# Altium PCB PCB1.PcbDoc (part 4 of 6)
Units mil, origin at the board's own origin, x right, y up, seen from the top; angles counter-clockwise.
Board outline 1280 x 1960 mil, 2 copper layers (Top Layer, Bottom Layer); 45 components, 63 nets, 326 pads, 83 vias.
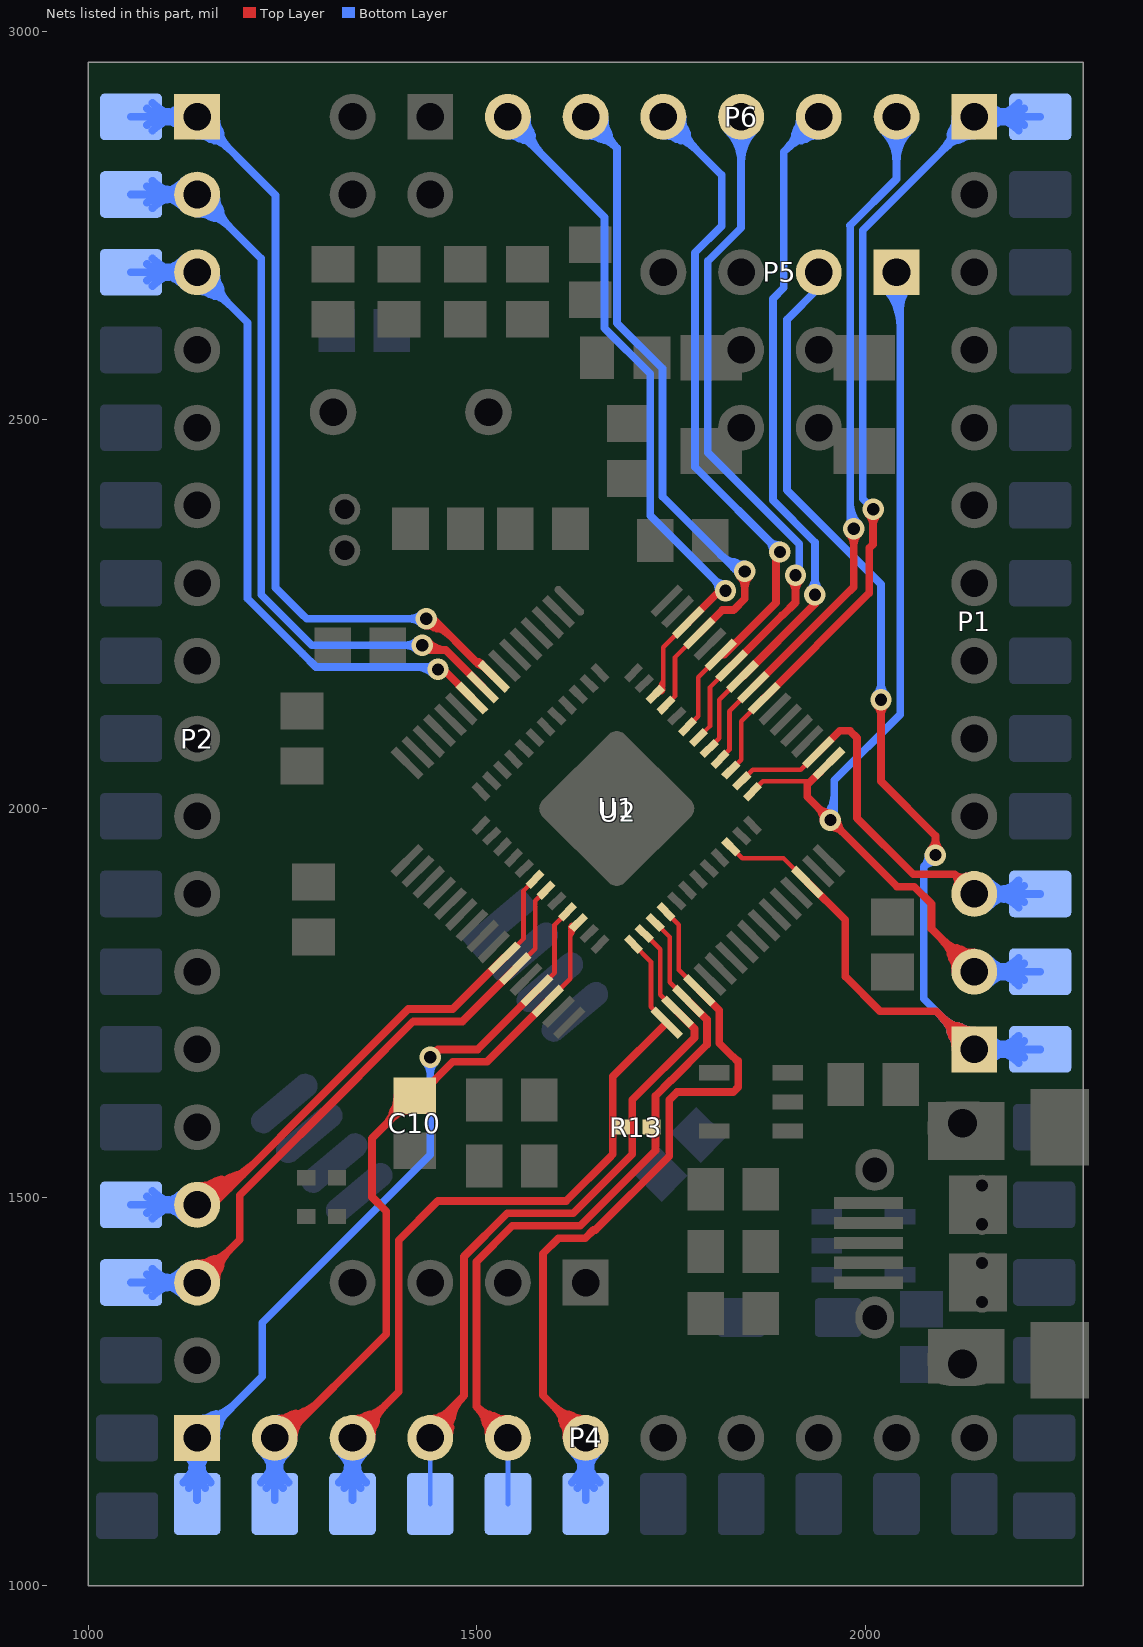
[diagram p4: the nets of this part, all layers, seen from the top]

## Via types
v1: diameter 27.56, hole 15.75, Top Layer to Bottom Layer, tented both sides, 79 vias
v2: diameter 23.62, hole 13.78, Top Layer to Bottom Layer, tented both sides, 3 vias
v3: diameter 23.62, hole 13.78, Top Layer to Bottom Layer, tented top, 1 vias

## Nets (pads, with @x,y where several pads share a name; then routed paths per layer and width w, separated by ;. In a path a pad name is that pad's centre, name@x,y a point inside that pad or via, vN(x,y) a via of type N, cw(c..) or ccw(c..) an arc to the next point about the centre after c; other vN are vias at no path point) (continued)
PA13: P1.1 P5.2 pad.1@2225,1690 U1.34 U2.46 | length 3637.7
  Top Layer w6: U1.34@1826.85,1950.59 1841.44,1936 1894.6,1936 U2.46@1925.26,1905.33
  Top Layer w10: U2.46@1925.26,1905.33 1974,1856.6 1974,1835 1973.91,1834.91 1973.91,1783.91 2018.83,1739 2091,1739 P1.1@2140,1690 ; v1(2020,2140) 2020,2035 2090,1965 v1(2090,1940) ; 2109.48,1712.35 ccw(c2146.61,1722.3) P1.1@2138.9,1684.64 ; 2117.65,1720.52 cw(c2107.7,1683.39) P1.1@2145.36,1691.1 ; 2020,2118.8 cw(c2041.2,2118.8) 2026.21,2133.79 ccw(c2041.2,2118.8) 2020,2118.8 ; 2020,2118.8 ccw(c1998.8,2118.8) 2013.79,2133.79 cw(c1998.8,2118.8) 2020,2118.8 ; 2090,1961.2 cw(c2068.8,1961.2) 2083.79,1946.21 ccw(c2068.8,1961.2) 2090,1961.2 ; 2090,1961.2 ccw(c2111.2,1961.2) 2096.21,1946.21 cw(c2111.2,1961.2) 2090,1961.2 ; 2098.13,1731.87 cw(c2056.26,1690) 2115.47,1690 ccw(c2056.26,1690) 2098.13,1731.87 ; 2098.13,1731.87 ccw(c2140,1773.74) 2140,1714.53 cw(c2140,1773.74) 2098.13,1731.87 ; P1.1@2115.2,1714.8 cw(c2090.4,1690) 2125.47,1690 ccw(c2090.4,1690) P1.1@2115.2,1714.8 ; P1.1@2115.2,1714.8 ccw(c2140,1739.6) 2140,1704.53 cw(c2140,1739.6) P1.1@2115.2,1714.8
  Bottom Layer w10: P5.2@1940,2690 1940,2670 1899,2629 1899,2409.63 2020,2288.63 v1(2020,2140) ; v1(2090,1940) 2075,1925 ; 2109.48,1712.35 ccw(c2146.61,1722.3) P1.1@2138.9,1684.64 ; 2117.65,1720.52 cw(c2107.7,1683.39) P1.1@2145.36,1691.1 ; P1.1@2160.62,1676.72 cw(c2174.28,1667.93) 2178.48,1683.61 cw(c2184.22,1705.04) P1.1@2163.22,1697.9 ; P1.1@2160.62,1703.28 ccw(c2174.28,1712.07) 2178.48,1696.39 ccw(c2184.22,1674.96) P1.1@2163.22,1682.1 ; pad.1@2225,1690 P1.1@2140,1690 2075,1755 2075,1925 ; 2020,2161.2 cw(c1998.8,2161.2) 2013.79,2146.21 ccw(c1998.8,2161.2) 2020,2161.2 ; 2020,2161.2 ccw(c2041.2,2161.2) 2026.21,2146.21 cw(c2041.2,2161.2) 2020,2161.2 ; 2075.01,1925.01 cw(c2090,1910.02) 2090,1931.22 ccw(c2090,1910.02) 2075.01,1925.01 ; 2075.01,1925.01 ccw(c2060.02,1940) 2081.22,1940 cw(c2060.02,1940) 2075.01,1925.01 ; 2098.13,1731.87 cw(c2056.26,1690) 2115.47,1690 ccw(c2056.26,1690) 2098.13,1731.87 ; 2098.13,1731.87 ccw(c2140,1773.74) 2140,1714.53 cw(c2140,1773.74) 2098.13,1731.87 ; P1.1@2115.2,1714.8 cw(c2090.4,1690) 2125.47,1690 ccw(c2090.4,1690) P1.1@2115.2,1714.8 ; P1.1@2115.2,1714.8 ccw(c2140,1739.6) 2140,1704.53 cw(c2140,1739.6) P1.1@2115.2,1714.8 ; P1.1@2154.64,1690 cw(c2154.64,1629.64) 2197.32,1672.32 ccw(c2154.64,1629.64) P1.1@2154.64,1690 ; P1.1@2154.64,1690 ccw(c2154.64,1750.36) 2197.32,1707.68 cw(c2154.64,1750.36) P1.1@2154.64,1690 ; 2175.07,1690 cw(c2175.07,1725.07) 2150.27,1700.27 ccw(c2175.07,1725.07) 2175.07,1690 ; 2175.07,1690 ccw(c2175.07,1654.93) 2150.27,1679.73 cw(c2175.07,1654.93) 2175.07,1690 ; 2176.44,1683.9 cw(c2180.44,1668.97) pad.1@2193.64,1677.01 ; 2176.44,1683.9 ccw(c2170.88,1704.65) pad.1@2191.27,1697.88 ; 2176.44,1683.9 cw(c2180.44,1668.97) pad.1@2193.64,1677.01 ; 2176.44,1683.9 ccw(c2170.88,1704.65) pad.1@2191.27,1697.88 ; 2176.44,1683.9 cw(c2180.44,1668.97) pad.1@2193.64,1677.01 ; 2176.44,1683.9 ccw(c2170.88,1704.65) pad.1@2191.27,1697.88 ; 2176.44,1696.1 cw(c2170.88,1675.35) pad.1@2191.27,1682.12 ; 2176.44,1696.1 ccw(c2180.44,1711.03) pad.1@2193.64,1702.99 ; 2176.44,1696.1 cw(c2170.88,1675.35) pad.1@2191.27,1682.12 ; 2176.44,1696.1 ccw(c2180.44,1711.03) pad.1@2193.64,1702.99 ; 2176.44,1696.1 cw(c2170.88,1675.35) pad.1@2191.27,1682.12 ; 2176.44,1696.1 ccw(c2180.44,1711.03) pad.1@2193.64,1702.99 ; 2178.79,1690 cw(c2178.79,1653.79) 2204.39,1679.39 ccw(c2178.79,1653.79) 2178.79,1690 ; 2178.79,1690 ccw(c2178.79,1726.21) 2204.39,1700.61 cw(c2178.79,1726.21) 2178.79,1690 ; pad.1@2199.21,1690 cw(c2199.21,1749.21) 2157.34,1707.34 ccw(c2199.21,1749.21) pad.1@2199.21,1690 ; pad.1@2199.21,1690 ccw(c2199.21,1630.79) 2157.34,1672.66 cw(c2199.21,1630.79) pad.1@2199.21,1690
PA14: P1.2 P5.1 pad.1@2225,1790 U1.37 U2.49 | length 3187.6
  Top Layer w6: U1.37@1854.69,2021.58 1868.11,2035 1929.66,2035 ; U2.49@1941.38,2046.72 U2.49@1953.1,2058.45
  Top Layer w10: U2.49@1941.38,2046.72 1929.66,2035 1925,2030.34 1925,2015 1965,1975 ; 1943.77,1994.15 ccw(c1957.64,1997.87) v1@1954.76,1983.8 ; 1945.85,1996.23 cw(c1942.13,1982.36) v1@1956.2,1985.24 ; v1@1953.8,1984.76 ccw(c1967.87,1987.64) 1964.15,1973.77 ; v1@1955.24,1986.2 cw(c1952.36,1972.13) 1966.23,1975.85 ; 2109.48,1812.35 ccw(c2146.61,1822.3) P1.2@2138.9,1784.64 ; 2117.65,1820.52 cw(c2107.7,1783.39) P1.2@2145.36,1791.1 ; P1.2@2140,1790 2085,1845 2085,1877.17 2062.95,1899.22 2040.78,1899.22 1965,1975 ; 1940.01,1999.99 cw(c1925.02,1985) 1946.22,1985 ccw(c1925.02,1985) 1940.01,1999.99 ; 1940.01,1999.99 ccw(c1955,2014.98) 1955,1993.78 cw(c1955,2014.98) 1940.01,1999.99 ; v1@1957.81,1976.68 cw(c1960.05,1970.05) 1965,1975 ; v1@1957.81,1976.68 cw(c1960.05,1970.05) 1965,1975 ; v1@1957.81,1976.68 cw(c1960.05,1970.05) 1965,1975 ; v1@1957.81,1976.68 cw(c1960.05,1970.05) 1965,1975 ; v1@1963.32,1982.19 ccw(c1969.95,1979.95) 1965,1975 ; v1@1963.32,1982.19 ccw(c1969.95,1979.95) 1965,1975 ; v1@1963.32,1982.19 ccw(c1969.95,1979.95) 1965,1975 ; v1@1963.32,1982.19 ccw(c1969.95,1979.95) 1965,1975 ; 1969.99,1970.01 cw(c1984.98,1985) 1963.78,1985 ccw(c1984.98,1985) 1969.99,1970.01 ; 1969.99,1970.01 ccw(c1955,1955.02) 1955,1976.22 cw(c1955,1955.02) 1969.99,1970.01 ; 2098.13,1831.87 cw(c2056.26,1790) 2115.47,1790 ccw(c2056.26,1790) 2098.13,1831.87 ; 2098.13,1831.87 ccw(c2140,1873.74) 2140,1814.53 cw(c2140,1873.74) 2098.13,1831.87 ; 2115.2,1814.8 cw(c2090.4,1790) 2125.47,1790 ccw(c2090.4,1790) 2115.2,1814.8 ; 2115.2,1814.8 ccw(c2140,1839.6) 2140,1804.53 cw(c2140,1839.6) 2115.2,1814.8
  Bottom Layer w10: v1@1960,1985 1960,2036.09 2044.78,2120.87 2044.78,2685.22 P5.1@2040,2690 ; P1.2@2140,1790 pad.1@2225,1790 ; P1.2@2160.62,1776.72 cw(c2174.28,1767.93) 2178.48,1783.61 cw(c2184.22,1805.04) P1.2@2163.22,1797.9 ; P1.2@2160.62,1803.28 ccw(c2174.28,1812.07) 2178.48,1796.39 ccw(c2184.22,1774.96) P1.2@2163.22,1782.1 ; P1.2@2154.64,1790 cw(c2154.64,1729.64) 2197.32,1772.32 ccw(c2154.64,1729.64) P1.2@2154.64,1790 ; P1.2@2154.64,1790 ccw(c2154.64,1850.36) 2197.32,1807.68 cw(c2154.64,1850.36) P1.2@2154.64,1790 ; 2175.07,1790 cw(c2175.07,1825.07) 2150.27,1800.27 ccw(c2175.07,1825.07) 2175.07,1790 ; 2175.07,1790 ccw(c2175.07,1754.93) 2150.27,1779.73 cw(c2175.07,1754.93) 2175.07,1790 ; 2176.44,1783.9 cw(c2180.44,1768.97) pad.1@2193.64,1777.01 ; 2176.44,1783.9 ccw(c2170.88,1804.65) pad.1@2191.27,1797.88 ; 2176.44,1783.9 cw(c2180.44,1768.97) pad.1@2193.64,1777.01 ; 2176.44,1783.9 ccw(c2170.88,1804.65) pad.1@2191.27,1797.88 ; 2176.44,1783.9 cw(c2180.44,1768.97) pad.1@2193.64,1777.01 ; 2176.44,1783.9 ccw(c2170.88,1804.65) pad.1@2191.27,1797.88 ; 2176.44,1796.1 cw(c2170.88,1775.35) pad.1@2191.27,1782.12 ; 2176.44,1796.1 ccw(c2180.44,1811.03) pad.1@2193.64,1802.99 ; 2176.44,1796.1 cw(c2170.88,1775.35) pad.1@2191.27,1782.12 ; 2176.44,1796.1 ccw(c2180.44,1811.03) pad.1@2193.64,1802.99 ; 2176.44,1796.1 cw(c2170.88,1775.35) pad.1@2191.27,1782.12 ; 2176.44,1796.1 ccw(c2180.44,1811.03) pad.1@2193.64,1802.99 ; 2178.79,1790 cw(c2178.79,1753.79) 2204.39,1779.39 ccw(c2178.79,1753.79) 2178.79,1790 ; 2178.79,1790 ccw(c2178.79,1826.21) 2204.39,1800.61 cw(c2178.79,1826.21) 2178.79,1790 ; pad.1@2199.21,1790 cw(c2199.21,1849.21) 2157.34,1807.34 ccw(c2199.21,1849.21) pad.1@2199.21,1790 ; pad.1@2199.21,1790 ccw(c2199.21,1730.79) 2157.34,1772.66 cw(c2199.21,1730.79) pad.1@2199.21,1790 ; v1@1948.79,1991.21 ccw(c1921.73,2018.27) 1960,2018.27 cw(c1921.73,2018.27) v1@1948.79,1991.21 ; P5.1@2022.66,2672.66 cw(c1969.25,2619.25) 2044.78,2619.25 ccw(c1969.25,2619.25) P5.1@2022.66,2672.66 ; P5.1@2029.73,2679.73 cw(c1993.39,2643.39) 2044.78,2643.39 ccw(c1993.39,2643.39) P5.1@2029.73,2679.73 ; 2044.78,2642.32 cw(c2087.68,2642.32) 2057.34,2672.66 ccw(c2087.68,2642.32) 2044.78,2642.32
  other v1: 1955,1985
PA15: P1.3 pad.1@2225,1890 U1.38 U2.50 | length 1555
  Top Layer w6: U1.38@1840.77,2035.49 1855,2049.72 1916.54,2049.72 U2.50@1939.18,2072.36
  Top Layer w10: U2.50@1939.18,2072.36 1966.82,2100 1980,2100 1989.22,2090.78 1989.22,1987.55 2061.55,1915.22 2114.78,1915.22 ; P1.3@2140,1890 2114.78,1915.22 ; 2114.78,1915.22 cw(c2105.12,1905.56) 2117.6,1899.99 ccw(c2105.12,1905.56) 2114.78,1915.22 ; 2114.78,1915.22 ccw(c2124.44,1924.88) 2130.01,1912.4 cw(c2124.44,1924.88) 2114.78,1915.22
  Bottom Layer w10: P1.3@2140,1890 pad.1@2225,1890 ; P1.3@2160.62,1876.72 cw(c2174.28,1867.93) 2178.48,1883.61 cw(c2184.22,1905.04) P1.3@2163.22,1897.9 ; P1.3@2160.62,1903.28 ccw(c2174.28,1912.07) 2178.48,1896.39 ccw(c2184.22,1874.96) P1.3@2163.22,1882.1 ; P1.3@2154.64,1890 cw(c2154.64,1829.64) 2197.32,1872.32 ccw(c2154.64,1829.64) P1.3@2154.64,1890 ; P1.3@2154.64,1890 ccw(c2154.64,1950.36) 2197.32,1907.68 cw(c2154.64,1950.36) P1.3@2154.64,1890 ; 2175.07,1890 cw(c2175.07,1925.07) 2150.27,1900.27 ccw(c2175.07,1925.07) 2175.07,1890 ; 2175.07,1890 ccw(c2175.07,1854.93) 2150.27,1879.73 cw(c2175.07,1854.93) 2175.07,1890 ; 2176.44,1883.9 cw(c2180.44,1868.97) pad.1@2193.64,1877.01 ; 2176.44,1883.9 ccw(c2170.88,1904.65) pad.1@2191.27,1897.88 ; 2176.44,1883.9 cw(c2180.44,1868.97) pad.1@2193.64,1877.01 ; 2176.44,1883.9 ccw(c2170.88,1904.65) pad.1@2191.27,1897.88 ; 2176.44,1883.9 cw(c2180.44,1868.97) pad.1@2193.64,1877.01 ; 2176.44,1883.9 ccw(c2170.88,1904.65) pad.1@2191.27,1897.88 ; 2176.44,1896.1 cw(c2170.88,1875.35) pad.1@2191.27,1882.12 ; 2176.44,1896.1 ccw(c2180.44,1911.03) pad.1@2193.64,1902.99 ; 2176.44,1896.1 cw(c2170.88,1875.35) pad.1@2191.27,1882.12 ; 2176.44,1896.1 ccw(c2180.44,1911.03) pad.1@2193.64,1902.99 ; 2176.44,1896.1 cw(c2170.88,1875.35) pad.1@2191.27,1882.12 ; 2176.44,1896.1 ccw(c2180.44,1911.03) pad.1@2193.64,1902.99 ; 2178.79,1890 cw(c2178.79,1853.79) 2204.39,1879.39 ccw(c2178.79,1853.79) 2178.79,1890 ; 2178.79,1890 ccw(c2178.79,1926.21) 2204.39,1900.61 cw(c2178.79,1926.21) 2178.79,1890 ; pad.1@2199.21,1890 cw(c2199.21,1949.21) 2157.34,1907.34 ccw(c2199.21,1949.21) pad.1@2199.21,1890 ; pad.1@2199.21,1890 ccw(c2199.21,1830.79) 2157.34,1872.66 cw(c2199.21,1830.79) pad.1@2199.21,1890
PB0: P2.15 pad.1@1055,1490 U1.18 U2.26 | length 2203.2
  Top Layer w6: U2.26@1535.52,1807.9 1560,1832.38 1560,1893.92 U1.18@1574.91,1908.83
  Top Layer w10: P2.15@1135.03,1492.3 cw(c1186.01,1468.71) 1171.47,1522.96 ; P2.15@1140,1490 1160,1490 1333,1663 1333,1663.25 1411.75,1742 1469.07,1742 1534.97,1807.9 U2.26@1535.52,1807.9 ; P2.15@1144.11,1488.1 cw(c1211.26,1457.02) 1192.11,1528.49 ; P2.15@1144.3,1488.59 cw(c1178.9,1477.26) 1169.48,1512.43 ; P2.15@1140,1494.53 ccw(c1140,1553.74) 1181.87,1511.87 cw(c1140,1553.74) P2.15@1140,1494.53 ; P2.15@1140,1504.53 ccw(c1140,1587.88) 1198.94,1528.94 cw(c1140,1587.88) P2.15@1140,1504.53 ; P2.15@1140,1514.53 ccw(c1140,1622.03) 1216.01,1546.01 cw(c1140,1622.03) P2.15@1140,1514.53
  Bottom Layer w10: pad.1@1055,1490 P2.15@1140,1490 ; P2.15@1116.78,1482.1 ccw(c1095.78,1474.96) 1101.52,1496.39 ccw(c1105.72,1512.07) P2.15@1119.38,1503.28 ; P2.15@1116.78,1497.9 cw(c1095.78,1505.04) 1101.52,1483.61 cw(c1105.72,1467.93) P2.15@1119.38,1476.72 ; pad.1@1080.79,1490 cw(c1080.79,1430.79) 1122.66,1472.66 ccw(c1080.79,1430.79) pad.1@1080.79,1490 ; pad.1@1080.79,1490 ccw(c1080.79,1549.21) 1122.66,1507.34 cw(c1080.79,1549.21) pad.1@1080.79,1490 ; pad.1@1086.36,1477.01 cw(c1099.56,1468.97) 1103.56,1483.9 ; pad.1@1086.36,1477.01 cw(c1099.56,1468.97) 1103.56,1483.9 ; pad.1@1086.36,1477.01 cw(c1099.56,1468.97) 1103.56,1483.9 ; pad.1@1086.36,1502.99 ccw(c1099.56,1511.03) 1103.56,1496.1 ; pad.1@1086.36,1502.99 ccw(c1099.56,1511.03) 1103.56,1496.1 ; pad.1@1086.36,1502.99 ccw(c1099.56,1511.03) 1103.56,1496.1 ; pad.1@1088.73,1482.12 cw(c1109.12,1475.35) 1103.56,1496.1 ; pad.1@1088.73,1482.12 cw(c1109.12,1475.35) 1103.56,1496.1 ; pad.1@1088.73,1482.12 cw(c1109.12,1475.35) 1103.56,1496.1 ; pad.1@1088.73,1497.88 ccw(c1109.12,1504.65) 1103.56,1483.9 ; pad.1@1088.73,1497.88 ccw(c1109.12,1504.65) 1103.56,1483.9 ; pad.1@1088.73,1497.88 ccw(c1109.12,1504.65) 1103.56,1483.9 ; 1101.21,1490 cw(c1101.21,1526.21) 1075.61,1500.61 ccw(c1101.21,1526.21) 1101.21,1490 ; 1101.21,1490 ccw(c1101.21,1453.79) 1075.61,1479.39 cw(c1101.21,1453.79) 1101.21,1490 ; 1104.93,1490 cw(c1104.93,1454.93) 1129.73,1479.73 ccw(c1104.93,1454.93) 1104.93,1490 ; 1104.93,1490 ccw(c1104.93,1525.07) 1129.73,1500.27 cw(c1104.93,1525.07) 1104.93,1490 ; P2.15@1125.36,1490 cw(c1125.36,1550.36) 1082.68,1507.68 ccw(c1125.36,1550.36) P2.15@1125.36,1490 ; P2.15@1125.36,1490 ccw(c1125.36,1429.64) 1082.68,1472.32 cw(c1125.36,1429.64) P2.15@1125.36,1490
PB1: P2.16 pad.1@1055,1390 U1.19 U2.27 | length 2124.8
  Top Layer w6: U2.27@1549.44,1793.98 1575,1819.54 1575,1881.08 U1.19@1588.83,1894.91
  Top Layer w10: P2.16@1134.64,1391.1 cw(c1172.3,1383.39) 1162.35,1420.52 ; P2.16@1140,1390 1195,1445 1195,1502.37 1349,1656.37 1349,1656.63 1418.37,1726 1481.46,1726 U2.27@1549.44,1793.98 ; P2.16@1141.1,1384.64 ccw(c1133.39,1422.3) 1170.52,1412.35 ; 1164.8,1414.8 cw(c1140,1439.6) 1140,1404.53 ccw(c1140,1439.6) 1164.8,1414.8 ; 1164.8,1414.8 ccw(c1189.6,1390) 1154.53,1390 cw(c1189.6,1390) 1164.8,1414.8 ; 1181.87,1431.87 cw(c1140,1473.74) 1140,1414.53 ccw(c1140,1473.74) 1181.87,1431.87 ; 1181.87,1431.87 ccw(c1223.74,1390) 1164.53,1390 cw(c1223.74,1390) 1181.87,1431.87
  Bottom Layer w10: pad.1@1055,1390 P2.16@1140,1390 ; P2.16@1116.78,1382.1 ccw(c1095.78,1374.96) 1101.52,1396.39 ccw(c1105.72,1412.07) P2.16@1119.38,1403.28 ; P2.16@1116.78,1397.9 cw(c1095.78,1405.04) 1101.52,1383.61 cw(c1105.72,1367.93) P2.16@1119.38,1376.72 ; pad.1@1080.79,1390 cw(c1080.79,1330.79) 1122.66,1372.66 ccw(c1080.79,1330.79) pad.1@1080.79,1390 ; pad.1@1080.79,1390 ccw(c1080.79,1449.21) 1122.66,1407.34 cw(c1080.79,1449.21) pad.1@1080.79,1390 ; pad.1@1086.36,1377.01 cw(c1099.56,1368.97) 1103.56,1383.9 ; pad.1@1086.36,1377.01 cw(c1099.56,1368.97) 1103.56,1383.9 ; pad.1@1086.36,1377.01 cw(c1099.56,1368.97) 1103.56,1383.9 ; pad.1@1086.36,1402.99 ccw(c1099.56,1411.03) 1103.56,1396.1 ; pad.1@1086.36,1402.99 ccw(c1099.56,1411.03) 1103.56,1396.1 ; pad.1@1086.36,1402.99 ccw(c1099.56,1411.03) 1103.56,1396.1 ; pad.1@1088.73,1382.12 cw(c1109.12,1375.35) 1103.56,1396.1 ; pad.1@1088.73,1382.12 cw(c1109.12,1375.35) 1103.56,1396.1 ; pad.1@1088.73,1382.12 cw(c1109.12,1375.35) 1103.56,1396.1 ; pad.1@1088.73,1397.88 ccw(c1109.12,1404.65) 1103.56,1383.9 ; pad.1@1088.73,1397.88 ccw(c1109.12,1404.65) 1103.56,1383.9 ; pad.1@1088.73,1397.88 ccw(c1109.12,1404.65) 1103.56,1383.9 ; 1101.21,1390 cw(c1101.21,1426.21) 1075.61,1400.61 ccw(c1101.21,1426.21) 1101.21,1390 ; 1101.21,1390 ccw(c1101.21,1353.79) 1075.61,1379.39 cw(c1101.21,1353.79) 1101.21,1390 ; 1104.93,1390 cw(c1104.93,1354.93) 1129.73,1379.73 ccw(c1104.93,1354.93) 1104.93,1390 ; 1104.93,1390 ccw(c1104.93,1425.07) 1129.73,1400.27 cw(c1104.93,1425.07) 1104.93,1390 ; P2.16@1125.36,1390 cw(c1125.36,1450.36) 1082.68,1407.68 ccw(c1125.36,1450.36) P2.16@1125.36,1390 ; P2.16@1125.36,1390 ccw(c1125.36,1329.64) 1082.68,1372.32 cw(c1125.36,1329.64) P2.16@1125.36,1390
PB3: P6.1 pad.1@2225,2890 U1.39 U2.55 | length 2444.8
  Top Layer w6: U1.39@1826.85,2049.41 1840,2062.56 1840,2112.37 U2.55@1869.59,2141.96
  Top Layer w10: U2.55@1869.59,2141.96 2005,2277.37 2005,2335 2009.78,2339.78 v1@2009.78,2384.78 ; v1@2003.79,2378.79 cw(c1989.34,2364.34) 2009.78,2364.34 ccw(c1989.34,2364.34) v1@2003.79,2378.79 ; 2009.78,2363.27 cw(c2031.73,2363.27) 2016.21,2378.79 ccw(c2031.73,2363.27) 2009.78,2363.27
  Bottom Layer w10: v1(2010,2385) 1996.53,2398.47 1996.53,2743.9 2140,2887.37 P6.1@2140,2890 pad.1@2225,2890 ; 2109.16,2866.45 cw(c2148.27,2855.98) P6.1@2138.71,2895.32 ; 2118.85,2859.81 ccw(c2109.41,2895.04) P6.1@2145.4,2889.11 ; P6.1@2160.62,2876.72 cw(c2174.28,2867.93) 2178.48,2883.61 cw(c2184.22,2905.04) P6.1@2163.22,2897.9 ; P6.1@2160.62,2903.28 ccw(c2174.28,2912.07) 2178.48,2896.39 ccw(c2184.22,2874.96) P6.1@2163.22,2882.1 ; P6.1@2154.64,2890 cw(c2154.64,2829.64) 2197.32,2872.32 ccw(c2154.64,2829.64) P6.1@2154.64,2890 ; P6.1@2154.64,2890 ccw(c2154.64,2950.36) 2197.32,2907.68 cw(c2154.64,2950.36) P6.1@2154.64,2890 ; 2175.07,2890 cw(c2175.07,2925.07) 2150.27,2900.27 ccw(c2175.07,2925.07) 2175.07,2890 ; 2175.07,2890 ccw(c2175.07,2854.93) 2150.27,2879.73 cw(c2175.07,2854.93) 2175.07,2890 ; 2176.44,2883.9 cw(c2180.44,2868.97) pad.1@2193.64,2877.01 ; 2176.44,2883.9 ccw(c2170.88,2904.65) pad.1@2191.27,2897.88 ; 2176.44,2883.9 cw(c2180.44,2868.97) pad.1@2193.64,2877.01 ; 2176.44,2883.9 ccw(c2170.88,2904.65) pad.1@2191.27,2897.88 ; 2176.44,2883.9 cw(c2180.44,2868.97) pad.1@2193.64,2877.01 ; 2176.44,2883.9 ccw(c2170.88,2904.65) pad.1@2191.27,2897.88 ; 2176.44,2896.1 cw(c2170.88,2875.35) pad.1@2191.27,2882.12 ; 2176.44,2896.1 ccw(c2180.44,2911.03) pad.1@2193.64,2902.99 ; 2176.44,2896.1 cw(c2170.88,2875.35) pad.1@2191.27,2882.12 ; 2176.44,2896.1 ccw(c2180.44,2911.03) pad.1@2193.64,2902.99 ; 2176.44,2896.1 cw(c2170.88,2875.35) pad.1@2191.27,2882.12 ; 2176.44,2896.1 ccw(c2180.44,2911.03) pad.1@2193.64,2902.99 ; 2178.79,2890 cw(c2178.79,2853.79) 2204.39,2879.39 ccw(c2178.79,2853.79) 2178.79,2890 ; 2178.79,2890 ccw(c2178.79,2926.21) 2204.39,2900.61 cw(c2178.79,2926.21) 2178.79,2890 ; pad.1@2199.21,2890 cw(c2199.21,2949.21) 2157.34,2907.34 ccw(c2199.21,2949.21) pad.1@2199.21,2890 ; pad.1@2199.21,2890 ccw(c2199.21,2830.79) 2157.34,2872.66 cw(c2199.21,2830.79) pad.1@2199.21,2890 ; 2096.27,2843.64 ccw(c2049.91,2890) 2115.47,2890 cw(c2049.91,2890) 2096.27,2843.64 ; 2102.61,2849.99 cw(c2140,2812.6) 2140,2865.47 ccw(c2140,2812.6) 2102.61,2849.99 ; P6.1@2113.34,2860.71 ccw(c2084.06,2890) 2125.47,2890 cw(c2084.06,2890) P6.1@2113.34,2860.71 ; P6.1@2119.69,2867.06 cw(c2140,2846.74) 2140,2875.47 ccw(c2140,2846.74) P6.1@2119.69,2867.06
PB4: P6.2 U1.40 U2.56 | length 1345.1
  Top Layer w6: U1.40@1812.93,2063.33 1825,2075.4 1825,2125.21 U2.56@1855.67,2155.88
  Top Layer w10: U2.56@1855.67,2155.88 1980,2280.21 1980.21,2280.21 1985,2285 v1(1985,2360) ; 1985,2338.8 cw(c2006.2,2338.8) 1991.21,2353.79 ccw(c2006.2,2338.8) 1985,2338.8 ; 1985,2338.8 ccw(c1963.8,2338.8) 1978.79,2353.79 cw(c1963.8,2338.8) 1985,2338.8
  Bottom Layer w10: v1(1985,2360) 1980.53,2364.47 1980.53,2749.47 1980,2750 2040,2810 P6.2@2040,2890 ; 2040,2830.79 cw(c2099.21,2830.79) 2057.34,2872.66 ccw(c2099.21,2830.79) 2040,2830.79 ; 2040,2830.79 ccw(c1980.79,2830.79) 2022.66,2872.66 cw(c1980.79,2830.79) 2040,2830.79 ; 2040,2854.93 cw(c2075.07,2854.93) 2050.27,2879.73 ccw(c2075.07,2854.93) 2040,2854.93 ; 2040,2854.93 ccw(c2004.93,2854.93) 2029.73,2879.73 cw(c2004.93,2854.93) 2040,2854.93 ; 1980.53,2391.99 ccw(c2016.99,2391.99) 1991.21,2366.21 cw(c2016.99,2391.99) 1980.53,2391.99
PB5: P6.3 U1.41 U2.57 | length 1417.3
  Top Layer w6: U1.41@1799.01,2077.25 1812,2090.24 1812,2140.05 U2.57@1841.75,2169.8
  Top Layer w10: U2.57@1841.75,2169.8 1935,2263.05 v1(1935,2275)
  Bottom Layer w10: 1895,2715 1895,2670 ; 1909.48,2867.65 cw(c1946.61,2857.7) P6.3@1938.9,2895.36 ; 1917.65,2859.48 ccw(c1907.7,2896.61) P6.3@1945.36,2888.9 ; v1@1939,2281 1940,2280 v1(1935,2275) 1935,2342.67 1881,2396.67 1881,2636 1881,2656 1895,2670 ; P6.3@1940,2890 1895,2845 1895,2670 ; 1898.13,2848.13 cw(c1940,2806.26) 1940,2865.47 ccw(c1940,2806.26) 1898.13,2848.13 ; 1898.13,2848.13 ccw(c1856.26,2890) 1915.47,2890 cw(c1856.26,2890) 1898.13,2848.13 ; 1915.2,2865.2 cw(c1940,2840.4) 1940,2875.47 ccw(c1940,2840.4) 1915.2,2865.2 ; 1915.2,2865.2 ccw(c1890.4,2890) 1925.47,2890 cw(c1890.4,2890) 1915.2,2865.2 ; 1935,2296.2 cw(c1913.8,2296.2) 1928.79,2281.21 ccw(c1913.8,2296.2) 1935,2296.2 ; 1935,2296.2 ccw(c1956.2,2296.2) 1941.21,2281.21 cw(c1956.2,2296.2) 1935,2296.2
PB6: P6.4 U1.42 U2.58 | length 1289.5
  Top Layer w6: U1.42@1785.09,2091.17 1800,2106.08 1800,2155.89 U2.58@1827.83,2183.72
  Top Layer w10: U2.58@1827.83,2183.72 1892.78,2248.67 1893.67,2248.67 1910,2265 v1(1910,2300) ; 1910,2278.8 cw(c1931.2,2278.8) 1916.21,2293.79 ccw(c1931.2,2278.8) 1910,2278.8 ; 1910,2278.8 ccw(c1888.8,2278.8) 1903.79,2293.79 cw(c1888.8,2278.8) 1910,2278.8
  Bottom Layer w10: P6.4@1835,2885 P6.4@1840,2890 1840,2747.31 1797,2704.31 1797,2458.04 1914.78,2340.26 1914.78,2304.78 v1(1910,2300) ; 1840,2830.79 cw(c1899.21,2830.79) 1857.34,2872.66 ccw(c1899.21,2830.79) 1840,2830.79 ; 1840,2830.79 ccw(c1780.79,2830.79) 1822.66,2872.66 cw(c1780.79,2830.79) 1840,2830.79 ; 1840,2854.93 cw(c1875.07,2854.93) 1850.27,2879.73 ccw(c1875.07,2854.93) 1840,2854.93 ; 1840,2854.93 ccw(c1804.93,2854.93) 1829.73,2879.73 cw(c1804.93,2854.93) 1840,2854.93
PB7: P6.5 U1.43 U2.59 | length 1378.3
  Top Layer w6: U1.43@1771.17,2105.09 1785,2118.92 1785,2168.73 U2.59@1813.91,2197.64
  Top Layer w10: U2.59@1813.91,2197.64 1817.94,2197.64 1885,2264.7 v1@1885,2320 ; U2.59@1828.05,2211.78 ccw(c1828.05,2221.51) 1834.93,2214.63 cw(c1828.05,2221.51) U2.59@1828.05,2211.78
  Bottom Layer w10: P6.5@1734.64,2888.9 ccw(c1772.3,2896.61) 1762.35,2859.48 ; P6.5@1740,2890 1815,2815 1815,2749.47 1780.53,2715 1780.53,2439.52 v1(1890,2330) ; P6.5@1741.1,2895.36 cw(c1733.39,2857.7) 1770.52,2867.65 ; 1764.8,2865.2 cw(c1789.6,2890) 1754.53,2890 ccw(c1789.6,2890) 1764.8,2865.2 ; 1764.8,2865.2 ccw(c1740,2840.4) 1740,2875.47 cw(c1740,2840.4) 1764.8,2865.2 ; 1781.87,2848.13 cw(c1823.74,2890) 1764.53,2890 ccw(c1823.74,2890) 1781.87,2848.13 ; 1781.87,2848.13 ccw(c1740,2806.26) 1740,2865.47 cw(c1740,2806.26) 1781.87,2848.13 ; 1874.98,2345.06 cw(c1859.92,2330) 1881.22,2330 ccw(c1859.92,2330) 1874.98,2345.06 ; 1875.09,2344.96 ccw(c1890,2359.87) 1890,2338.78 cw(c1890,2359.87) 1875.09,2344.96
PB8: P6.6 U1.45 U2.61 | length 1452.5
  Top Layer w6: U1.45@1743.33,2132.93 1755,2144.6 1755,2194.41 U2.61@1786.07,2225.48
  Top Layer w10: U2.61@1786.07,2225.48 1815.81,2255.22 1830.26,2255.22 1844.78,2269.74 v1(1844.78,2305) ; 1844.78,2283.8 cw(c1865.98,2283.8) 1850.99,2298.79 ccw(c1865.98,2283.8) 1844.78,2283.8 ; 1844.78,2283.8 ccw(c1823.58,2283.8) 1838.57,2298.79 cw(c1823.58,2283.8) 1844.78,2283.8
  Bottom Layer w10: P6.6@1634.72,2888.56 ccw(c1673.74,2899.22) 1664.41,2859.86 ; P6.6@1640,2890 1680.22,2849.78 ; P6.6@1641.44,2895.28 cw(c1630.78,2856.26) 1670.14,2865.59 ; 1830.66,2317.56 cw(c1824.32,2293.9) v1@1845.85,2305.58 ; v1(1844.78,2305) 1835,2305 1739,2401 1739,2565.96 1680.22,2624.74 1680.22,2849.78 ; 1663.82,2866.18 cw(c1686.3,2888.66) 1654.52,2889.58 ccw(c1686.3,2888.66) 1663.82,2866.18 ; 1663.82,2866.18 ccw(c1641.34,2843.7) 1640.42,2875.48 cw(c1641.34,2843.7) 1663.82,2866.18 ; 1680.22,2849.78 cw(c1718.18,2887.74) 1664.52,2889.29 ccw(c1718.18,2887.74) 1680.22,2849.78 ; 1680.22,2849.78 ccw(c1642.26,2811.82) 1640.71,2865.48 cw(c1642.26,2811.82) 1680.22,2849.78 ; 1813.1,2326.9 ccw(c1844.78,2358.59) 1844.78,2313.78 cw(c1844.78,2358.59) 1813.1,2326.9 ; 1830.17,2309.83 ccw(c1844.78,2324.44) 1844.78,2303.78 cw(c1844.78,2324.44) 1830.17,2309.83
PB9: P6.7 U1.46 U2.62 | length 1374.1
  Top Layer w6: U1.46@1729.41,2146.85 1740,2157.44 1740,2207.25 U2.62@1772.15,2239.4 ; U1.46@1736.84,2152.92 cw(c1747.44,2155.76) 1737.93,2161.24 ; U1.46@1733.62,2153.78 ccw(c1718.23,2169.17) 1740,2169.17 cw(c1718.23,2169.17) U1.46@1733.62,2153.78 ; U1.46@1737.87,2149.53 ccw(c1732.71,2154.69) 1740,2154.69 cw(c1732.71,2154.69) U1.46@1737.87,2149.53
  Top Layer w10: U2.62@1772.15,2239.4 1812.75,2280 v1(1820,2280)
  Bottom Layer w10: P6.7@1534.57,2889.31 ccw(c1569.07,2893.68) 1560.07,2860.1 ; P6.7@1535,2885 P6.7@1540,2890 1540,2885 1664.22,2760.78 1664.22,2618.11 1723,2559.33 1723,2377 v1(1820,2280) ; P6.7@1541.46,2895.27 cw(c1530.16,2854.4) 1571.13,2865.37 ; 1805.01,2294.99 cw(c1790.02,2280) 1811.22,2280 ccw(c1790.02,2280) 1805.01,2294.99 ; 1805.01,2294.99 ccw(c1820,2309.98) 1820,2288.78 cw(c1820,2309.98) 1805.01,2294.99 ; P6.7@1540,2865.47 cw(c1540,2818.33) 1573.34,2851.66 ccw(c1540,2818.33) P6.7@1540,2865.47 ; P6.7@1554.53,2890 ccw(c1601.67,2890) 1568.34,2856.66 cw(c1601.67,2890) P6.7@1554.53,2890 ; P6.7@1564.53,2890 ccw(c1635.81,2890) 1585.41,2839.59 cw(c1635.81,2890) P6.7@1564.53,2890
PB10: P4.1 pad.1@1140,1105 U1.21 U2.29 | length 2376.1
  Top Layer w6: U2.29@1577.28,1766.14 1600,1788.86 1600,1850.4 U1.21@1616.67,1867.07
  Top Layer w10: v1(1440,1680) 1450,1690 ; U2.29@1577.28,1766.14 1501.14,1690 1450,1690 ; 1450,1690 cw(c1445.05,1694.95) 1442.81,1688.32 ccw(c1445.05,1694.95) 1450,1690 ; 1450,1690 ccw(c1454.95,1685.05) 1448.32,1682.81 cw(c1454.95,1685.05) 1450,1690
  Bottom Layer w10: P4.1@1126.72,1169.38 cw(c1117.93,1155.72) 1133.61,1151.52 cw(c1155.04,1145.78) P4.1@1147.9,1166.78 ; P4.1@1132.1,1166.78 cw(c1124.96,1145.78) 1146.39,1151.52 cw(c1162.07,1155.72) P4.1@1153.28,1169.38 ; P4.1@1134.73,1191.46 cw(c1175.6,1180.16) 1164.63,1221.13 ; pad.1@1140,1110 P4.1@1140,1190 ; P4.1@1140.69,1184.57 ccw(c1136.32,1219.07) 1169.9,1210.07 ; P4.1@1165,1190 1145,1190 1224,1269 1224,1338.3 1440,1554.3 v1(1440,1680) ; pad.1@1127.01,1136.36 ccw(c1118.97,1149.56) 1133.9,1153.56 ; pad.1@1127.01,1136.36 ccw(c1118.97,1149.56) 1133.9,1153.56 ; pad.1@1127.01,1136.36 ccw(c1118.97,1149.56) 1133.9,1153.56 ; pad.1@1132.12,1138.73 ccw(c1125.35,1159.12) 1146.1,1153.56 ; pad.1@1132.12,1138.73 ccw(c1125.35,1159.12) 1146.1,1153.56 ; pad.1@1132.12,1138.73 ccw(c1125.35,1159.12) 1146.1,1153.56 ; 1133.9,1153.56 ccw(c1154.65,1159.12) pad.1@1147.88,1138.73 ; 1133.9,1153.56 ccw(c1154.65,1159.12) pad.1@1147.88,1138.73 ; 1133.9,1153.56 ccw(c1154.65,1159.12) pad.1@1147.88,1138.73 ; pad.1@1140,1130.79 cw(c1199.21,1130.79) 1157.34,1172.66 ccw(c1199.21,1130.79) pad.1@1140,1130.79 ; pad.1@1140,1130.79 ccw(c1080.79,1130.79) 1122.66,1172.66 cw(c1080.79,1130.79) pad.1@1140,1130.79 ; 1140,1151.21 cw(c1103.79,1151.21) 1129.39,1125.61 ccw(c1103.79,1151.21) 1140,1151.21 ; 1140,1151.21 ccw(c1176.21,1151.21) 1150.61,1125.61 cw(c1176.21,1151.21) 1140,1151.21 ; 1140,1154.93 cw(c1175.07,1154.93) 1150.27,1179.73 ccw(c1175.07,1154.93) 1140,1154.93 ; 1140,1154.93 ccw(c1104.93,1154.93) 1129.73,1179.73 cw(c1104.93,1154.93) 1140,1154.93 ; P4.1@1140,1175.36 cw(c1079.64,1175.36) 1122.32,1132.68 ccw(c1079.64,1175.36) P4.1@1140,1175.36 ; P4.1@1140,1175.36 ccw(c1200.36,1175.36) 1157.68,1132.68 cw(c1200.36,1175.36) P4.1@1140,1175.36 ; 1146.1,1153.56 ccw(c1161.03,1149.56) pad.1@1152.99,1136.36 ; 1146.1,1153.56 ccw(c1161.03,1149.56) pad.1@1152.99,1136.36 ; 1146.1,1153.56 ccw(c1161.03,1149.56) pad.1@1152.99,1136.36 ; 1440,1658.8 cw(c1461.2,1658.8) 1446.21,1673.79 ccw(c1461.2,1658.8) 1440,1658.8 ; 1440,1658.8 ccw(c1418.8,1658.8) 1433.79,1673.79 cw(c1418.8,1658.8) 1440,1658.8 ; P4.1@1140,1204.53 ccw(c1140,1251.67) 1173.34,1218.34 cw(c1140,1251.67) P4.1@1140,1204.53 ; P4.1@1140,1214.53 ccw(c1140,1285.81) 1190.41,1235.41 cw(c1140,1285.81) P4.1@1140,1214.53 ; P4.1@1164.53,1190 cw(c1211.67,1190) 1178.34,1223.34 ccw(c1211.67,1190) P4.1@1164.53,1190
PB11: C10.2 P4.2 pad.1@1240,1105 U1.22 U2.30 | length 2659.6
  Top Layer w6: U2.30@1591.2,1752.22 1620,1781.02 1620,1842.56 U1.22@1630.59,1853.15 ; 1622.07,1838.76 ccw(c1612.56,1844.24) U1.22@1623.16,1847.08 ; 1620,1830.83 cw(c1641.77,1830.83) 1626.38,1846.22 ccw(c1641.77,1830.83) 1620,1830.83 ; 1620,1840.49 cw(c1625.18,1840.49) 1625.06,1845.66 ccw(c1625.18,1840.49) 1620,1840.49 ; 1620,1845.31 cw(c1627.29,1845.31) 1622.13,1850.47 ccw(c1627.29,1845.31) 1620,1845.31
  Top Layer w10: P4.2@1234.82,1191.77 cw(c1278.99,1176.64) 1266.91,1221.74 ; P4.2@1240,1190 1250,1190 1383.47,1323.47 1383.47,1481.53 1365,1500 1365,1575.43 C10.2@1420,1630.43 1425.48,1630.43 1469.04,1674 1512.98,1674 U2.30@1591.2,1752.22 ; P4.2@1240.22,1184.53 ccw(c1238.95,1215.92) 1269.29,1207.79 ; P4.2@1244.28,1188.53 cw(c1300.39,1169.3) 1285.04,1226.6 ; P4.2@1244.48,1189.34 cw(c1270.46,1185.5) 1263.67,1210.87 ; 1391.15,1606.97 cw(c1425.15,1597.86) C10.2@1415.69,1631.76 ; P4.2@1240,1204.53 ccw(c1240,1263.74) 1281.87,1221.87 cw(c1240,1263.74) P4.2@1240,1204.53 ; P4.2@1240,1214.53 ccw(c1240,1297.88) 1298.94,1238.94 cw(c1240,1297.88) P4.2@1240,1214.53 ; P4.2@1264.53,1190 cw(c1299.6,1190) 1274.8,1214.8 ccw(c1299.6,1190) P4.2@1264.53,1190 ; 1381.49,1591.92 ccw(c1342.98,1630.43) 1397.44,1630.43 cw(c1342.98,1630.43) 1381.49,1591.92 ; 1390.99,1601.43 cw(c1416.06,1576.36) 1416.06,1611.81 ccw(c1416.06,1576.36) 1390.99,1601.43 ; C10.2@1398.56,1608.99 ccw(c1377.12,1630.43) 1407.44,1630.43 cw(c1377.12,1630.43) C10.2@1398.56,1608.99
  Bottom Layer w10: P4.2@1226.72,1169.38 cw(c1217.93,1155.72) 1233.61,1151.52 cw(c1255.04,1145.78) P4.2@1247.9,1166.78 ; P4.2@1232.1,1166.78 cw(c1224.96,1145.78) 1246.39,1151.52 cw(c1262.07,1155.72) P4.2@1253.28,1169.38 ; pad.1@1240,1110 P4.2@1240,1190 ; P4.2@1245,1190 P4.2@1245,1215 ; pad.1@1227.01,1136.36 ccw(c1218.97,1149.56) 1233.9,1153.56 ; pad.1@1227.01,1136.36 ccw(c1218.97,1149.56) 1233.9,1153.56 ; pad.1@1227.01,1136.36 ccw(c1218.97,1149.56) 1233.9,1153.56 ; pad.1@1232.12,1138.73 ccw(c1225.35,1159.12) 1246.1,1153.56 ; pad.1@1232.12,1138.73 ccw(c1225.35,1159.12) 1246.1,1153.56 ; pad.1@1232.12,1138.73 ccw(c1225.35,1159.12) 1246.1,1153.56 ; 1233.9,1153.56 ccw(c1254.65,1159.12) pad.1@1247.88,1138.73 ; 1233.9,1153.56 ccw(c1254.65,1159.12) pad.1@1247.88,1138.73 ; 1233.9,1153.56 ccw(c1254.65,1159.12) pad.1@1247.88,1138.73 ; pad.1@1240,1130.79 cw(c1299.21,1130.79) 1257.34,1172.66 ccw(c1299.21,1130.79) pad.1@1240,1130.79 ; pad.1@1240,1130.79 ccw(c1180.79,1130.79) 1222.66,1172.66 cw(c1180.79,1130.79) pad.1@1240,1130.79 ; 1240,1151.21 cw(c1203.79,1151.21) 1229.39,1125.61 ccw(c1203.79,1151.21) 1240,1151.21 ; 1240,1151.21 ccw(c1276.21,1151.21) 1250.61,1125.61 cw(c1276.21,1151.21) 1240,1151.21 ; 1240,1154.93 cw(c1275.07,1154.93) 1250.27,1179.73 ccw(c1275.07,1154.93) 1240,1154.93 ; 1240,1154.93 ccw(c1204.93,1154.93) 1229.73,1179.73 cw(c1204.93,1154.93) 1240,1154.93 ; P4.2@1240,1175.36 cw(c1179.64,1175.36) 1222.32,1132.68 ccw(c1179.64,1175.36) P4.2@1240,1175.36 ; P4.2@1240,1175.36 ccw(c1300.36,1175.36) 1257.68,1132.68 cw(c1300.36,1175.36) P4.2@1240,1175.36 ; 1246.1,1153.56 ccw(c1261.03,1149.56) pad.1@1252.99,1136.36 ; 1246.1,1153.56 ccw(c1261.03,1149.56) pad.1@1252.99,1136.36 ; 1246.1,1153.56 ccw(c1261.03,1149.56) pad.1@1252.99,1136.36
PB12: P4.3 pad.1@1340,1105 R13.2 U1.25 U2.33 | length 2309.1
  Top Layer w6: U1.25@1701.58,1825.31 1724,1802.89 1724,1744.69 U2.33@1744.31,1724.38
  Top Layer w10: P4.3@1334.64,1191.1 cw(c1372.3,1183.39) 1362.35,1220.52 ; P4.3@1340,1190 1399.47,1249.47 1399.47,1444.47 1450,1495 1615,1495 1671.25,1551.25 1675,1555 1675,1655.07 U2.33@1744.31,1724.38 ; P4.3@1341.1,1184.64 ccw(c1333.39,1222.3) 1370.52,1212.35 ; 1364.8,1214.8 cw(c1340,1239.6) 1340,1204.53 ccw(c1340,1239.6) 1364.8,1214.8 ; 1364.8,1214.8 ccw(c1389.6,1190) 1354.53,1190 cw(c1389.6,1190) 1364.8,1214.8 ; 1381.87,1231.87 cw(c1340,1273.74) 1340,1214.53 ccw(c1340,1273.74) 1381.87,1231.87 ; 1381.87,1231.87 ccw(c1423.74,1190) 1364.53,1190 cw(c1423.74,1190) 1381.87,1231.87
  Bottom Layer w10: P4.3@1326.72,1169.38 cw(c1317.93,1155.72) 1333.61,1151.52 cw(c1355.04,1145.78) P4.3@1347.9,1166.78 ; P4.3@1332.1,1166.78 cw(c1324.96,1145.78) 1346.39,1151.52 cw(c1362.07,1155.72) P4.3@1353.28,1169.38 ; pad.1@1340,1110 P4.3@1340,1190 ; pad.1@1327.01,1136.36 ccw(c1318.97,1149.56) 1333.9,1153.56 ; pad.1@1327.01,1136.36 ccw(c1318.97,1149.56) 1333.9,1153.56 ; pad.1@1327.01,1136.36 ccw(c1318.97,1149.56) 1333.9,1153.56 ; pad.1@1332.12,1138.73 ccw(c1325.35,1159.12) 1346.1,1153.56 ; pad.1@1332.12,1138.73 ccw(c1325.35,1159.12) 1346.1,1153.56 ; pad.1@1332.12,1138.73 ccw(c1325.35,1159.12) 1346.1,1153.56 ; 1333.9,1153.56 ccw(c1354.65,1159.12) pad.1@1347.88,1138.73 ; 1333.9,1153.56 ccw(c1354.65,1159.12) pad.1@1347.88,1138.73 ; 1333.9,1153.56 ccw(c1354.65,1159.12) pad.1@1347.88,1138.73 ; pad.1@1340,1130.79 cw(c1399.21,1130.79) 1357.34,1172.66 ccw(c1399.21,1130.79) pad.1@1340,1130.79 ; pad.1@1340,1130.79 ccw(c1280.79,1130.79) 1322.66,1172.66 cw(c1280.79,1130.79) pad.1@1340,1130.79 ; 1340,1151.21 cw(c1303.79,1151.21) 1329.39,1125.61 ccw(c1303.79,1151.21) 1340,1151.21 ; 1340,1151.21 ccw(c1376.21,1151.21) 1350.61,1125.61 cw(c1376.21,1151.21) 1340,1151.21 ; 1340,1154.93 cw(c1375.07,1154.93) 1350.27,1179.73 ccw(c1375.07,1154.93) 1340,1154.93 ; 1340,1154.93 ccw(c1304.93,1154.93) 1329.73,1179.73 cw(c1304.93,1154.93) 1340,1154.93 ; P4.3@1340,1175.36 cw(c1279.64,1175.36) 1322.32,1132.68 ccw(c1279.64,1175.36) P4.3@1340,1175.36 ; P4.3@1340,1175.36 ccw(c1400.36,1175.36) 1357.68,1132.68 cw(c1400.36,1175.36) P4.3@1340,1175.36 ; 1346.1,1153.56 ccw(c1361.03,1149.56) pad.1@1352.99,1136.36 ; 1346.1,1153.56 ccw(c1361.03,1149.56) pad.1@1352.99,1136.36 ; 1346.1,1153.56 ccw(c1361.03,1149.56) pad.1@1352.99,1136.36
PB13: P4.4 pad.1@1440,1105 U1.26 U2.34 | length 1368.2
  Top Layer w6: U1.26@1715.49,1839.23 1736,1818.72 1736,1760.53 U2.34@1758.23,1738.3
  Top Layer w10: P4.4@1434.53,1190.12 cw(c1465.3,1189.45) 1457.33,1219.17 ; P4.4@1438.43,1194.25 ccw(c1427.02,1225.11) 1459.42,1219.4 ; P4.4@1440,1190 P4.4@1440,1195 ; P4.4@1442.81,1185.31 ccw(c1412.83,1235.31) 1470.25,1225.2 ; P4.4@1446.53,1191.53 1445,1190 P4.4@1440,1195 ; P4.4@1447.96,1176.73 ccw(c1427.74,1210.44) 1466.45,1203.63 ; U2.34@1758.23,1738.3 1780,1716.53 1780,1705 1700,1625 1700,1555 1624,1479 1539,1479 1483.47,1423.47 1483.47,1244.47 ; P4.4@1440,1195 1440,1201 1483.47,1244.47 ; 1483.47,1244.47 ccw(c1530.04,1197.9) 1464.43,1192.14 cw(c1530.04,1197.9) 1483.47,1244.47 ; P4.4@1440,1214.53 ccw(c1440,1247.19) 1463.09,1224.09 cw(c1440,1247.19) P4.4@1440,1214.53 ; P4.4@1454.47,1191.27 cw(c1502.17,1195.46) 1468.31,1229.31 ccw(c1502.17,1195.46) P4.4@1454.47,1191.27
  Bottom Layer w6: pad.1@1440,1105 P4.4@1440,1190
PB14: P4.5 pad.1@1540,1105 R13.1 U1.27 U2.35 | length 1334.8
  Top Layer w6: U1.27@1729.41,1853.15 1748,1834.56 1748,1776.37 U2.35@1772.15,1752.22
  Top Layer w10: 1509.79,1213.97 ccw(c1548.64,1223.41) P4.5@1538.63,1184.7 ; 1516.03,1220.21 cw(c1506.59,1181.36) P4.5@1545.3,1191.37 ; P4.5@1540,1190 1499.47,1230.53 ; U2.35@1772.15,1752.22 1796,1728.37 1796,1696 1750,1650 1749.57,1650 1730,1630.43 1730,1560 1633,1463 1545.63,1463 1499.47,1416.85 1499.47,1230.53 ; 1499.47,1230.53 cw(c1460.8,1191.85) 1515.48,1190.57 ccw(c1460.8,1191.85) 1499.47,1230.53 ; 1499.47,1230.53 ccw(c1538.15,1269.2) 1539.43,1214.52 cw(c1538.15,1269.2) 1499.47,1230.53 ; 1516,1214 cw(c1493.09,1191.1) 1525.48,1190.34 ccw(c1493.09,1191.1) 1516,1214 ; 1516,1214 ccw(c1538.9,1236.91) 1539.66,1204.52 cw(c1538.9,1236.91) 1516,1214
  Bottom Layer w6: pad.1@1540,1105 P4.5@1540,1190
PB15: P4.6 pad.1@1640,1105 U1.28 U2.36 | length 2309.1
  Top Layer w6: U1.28@1743.33,1867.07 1760,1850.4 1760,1792.21 U2.36@1786.07,1766.14
  Top Layer w10: 1609.48,1212.35 ccw(c1646.61,1222.3) P4.6@1638.9,1184.64 ; 1617.65,1220.52 cw(c1607.7,1183.39) P4.6@1645.36,1191.1 ; P4.6@1629.47,1210.07 P4.6@1629.47,1200.53 ; P4.6@1640,1190 P4.6@1629.47,1200.53 ; U2.36@1786.07,1766.14 1812,1740.21 1812,1698 1829.35,1680.65 1829.75,1680.65 1835.4,1675 1836.5,1675 1836.5,1641.5 1830,1635 1757.63,1635 1747.5,1624.87 1747.5,1552.5 1652.5,1457.5 1650.13,1457.5 1639.63,1447 1605,1447 1585,1427 1585,1245 P4.6@1629.47,1200.53 ; 1598.13,1231.87 cw(c1556.26,1190) 1615.47,1190 ccw(c1556.26,1190) 1598.13,1231.87 ; 1598.13,1231.87 ccw(c1640,1273.74) 1640,1214.53 cw(c1640,1273.74) 1598.13,1231.87 ; 1615.2,1214.8 cw(c1590.4,1190) 1625.47,1190 ccw(c1590.4,1190) 1615.2,1214.8 ; 1615.2,1214.8 ccw(c1640,1239.6) 1640,1204.53 cw(c1640,1239.6) 1615.2,1214.8
  Bottom Layer w10: P4.6@1626.72,1169.38 cw(c1617.93,1155.72) 1633.61,1151.52 cw(c1655.04,1145.78) P4.6@1647.9,1166.78 ; P4.6@1632.1,1166.78 cw(c1624.96,1145.78) 1646.39,1151.52 cw(c1662.07,1155.72) P4.6@1653.28,1169.38 ; pad.1@1640,1110 P4.6@1640,1190 ; pad.1@1627.01,1136.36 ccw(c1618.97,1149.56) 1633.9,1153.56 ; pad.1@1627.01,1136.36 ccw(c1618.97,1149.56) 1633.9,1153.56 ; pad.1@1627.01,1136.36 ccw(c1618.97,1149.56) 1633.9,1153.56 ; pad.1@1632.12,1138.73 ccw(c1625.35,1159.12) 1646.1,1153.56 ; pad.1@1632.12,1138.73 ccw(c1625.35,1159.12) 1646.1,1153.56 ; pad.1@1632.12,1138.73 ccw(c1625.35,1159.12) 1646.1,1153.56 ; 1633.9,1153.56 ccw(c1654.65,1159.12) pad.1@1647.88,1138.73 ; 1633.9,1153.56 ccw(c1654.65,1159.12) pad.1@1647.88,1138.73 ; 1633.9,1153.56 ccw(c1654.65,1159.12) pad.1@1647.88,1138.73 ; pad.1@1640,1130.79 cw(c1699.21,1130.79) 1657.34,1172.66 ccw(c1699.21,1130.79) pad.1@1640,1130.79 ; pad.1@1640,1130.79 ccw(c1580.79,1130.79) 1622.66,1172.66 cw(c1580.79,1130.79) pad.1@1640,1130.79 ; 1640,1151.21 cw(c1603.79,1151.21) 1629.39,1125.61 ccw(c1603.79,1151.21) 1640,1151.21 ; 1640,1151.21 ccw(c1676.21,1151.21) 1650.61,1125.61 cw(c1676.21,1151.21) 1640,1151.21 ; 1640,1154.93 cw(c1675.07,1154.93) 1650.27,1179.73 ccw(c1675.07,1154.93) 1640,1154.93 ; 1640,1154.93 ccw(c1604.93,1154.93) 1629.73,1179.73 cw(c1604.93,1154.93) 1640,1154.93 ; P4.6@1640,1175.36 cw(c1579.64,1175.36) 1622.32,1132.68 ccw(c1579.64,1175.36) P4.6@1640,1175.36 ; P4.6@1640,1175.36 ccw(c1700.36,1175.36) 1657.68,1132.68 cw(c1700.36,1175.36) P4.6@1640,1175.36 ; 1646.1,1153.56 ccw(c1661.03,1149.56) pad.1@1652.99,1136.36 ; 1646.1,1153.56 ccw(c1661.03,1149.56) pad.1@1652.99,1136.36 ; 1646.1,1153.56 ccw(c1661.03,1149.56) pad.1@1652.99,1136.36
PC0: P2.1 pad.1@1055,2890 U2.8 | length 2573.8
  Top Layer w10: v1@1433.91,2243.44 ccw(c1454.59,2254) 1448.58,2231.58 ; v1(1435,2244) 1443.71,2244 1498.86,2188.86 ; U2.8@1521.6,2169.8 1502.54,2188.86 1498.86,2188.86 ; 1498.86,2188.86 cw(c1498.86,2178.87) U2.8@1507.46,2183.94 ; 1498.86,2188.86 cw(c1498.86,2178.87) U2.8@1507.46,2183.94 ; 1501.17,2186.55 ccw(c1507.46,2192.84) U2.8@1507.46,2183.94 ; 1501.17,2186.55 ccw(c1507.46,2192.84) U2.8@1507.46,2183.94 ; 1501.17,2186.55 ccw(c1507.46,2192.84) U2.8@1507.46,2183.94 ; 1501.17,2186.55 ccw(c1507.46,2192.84) U2.8@1507.46,2183.94 ; v1@1435,2235.22 cw(c1435,2192.99) 1464.86,2222.85 ccw(c1435,2192.99) v1@1435,2235.22
  Bottom Layer w10: pad.1@1055,2890 P2.1@1140,2890 1241,2789 1241,2284 1275,2250 1281,2244 v1(1435,2244) ; P2.1@1116.78,2882.1 ccw(c1095.78,2874.96) 1101.52,2896.39 ccw(c1105.72,2912.07) P2.1@1119.38,2903.28 ; P2.1@1116.78,2897.9 cw(c1095.78,2905.04) 1101.52,2883.61 cw(c1105.72,2867.93) P2.1@1119.38,2876.72 ; P2.1@1134.64,2888.9 ccw(c1172.3,2896.61) 1162.35,2859.48 ; P2.1@1141.1,2895.36 cw(c1133.39,2857.7) 1170.52,2867.65 ; pad.1@1080.79,2890 cw(c1080.79,2830.79) 1122.66,2872.66 ccw(c1080.79,2830.79) pad.1@1080.79,2890 ; pad.1@1080.79,2890 ccw(c1080.79,2949.21) 1122.66,2907.34 cw(c1080.79,2949.21) pad.1@1080.79,2890 ; pad.1@1086.36,2877.01 cw(c1099.56,2868.97) 1103.56,2883.9 ; pad.1@1086.36,2877.01 cw(c1099.56,2868.97) 1103.56,2883.9 ; pad.1@1086.36,2877.01 cw(c1099.56,2868.97) 1103.56,2883.9 ; pad.1@1086.36,2902.99 ccw(c1099.56,2911.03) 1103.56,2896.1 ; pad.1@1086.36,2902.99 ccw(c1099.56,2911.03) 1103.56,2896.1 ; pad.1@1086.36,2902.99 ccw(c1099.56,2911.03) 1103.56,2896.1 ; pad.1@1088.73,2882.12 cw(c1109.12,2875.35) 1103.56,2896.1 ; pad.1@1088.73,2882.12 cw(c1109.12,2875.35) 1103.56,2896.1 ; pad.1@1088.73,2882.12 cw(c1109.12,2875.35) 1103.56,2896.1 ; pad.1@1088.73,2897.88 ccw(c1109.12,2904.65) 1103.56,2883.9 ; pad.1@1088.73,2897.88 ccw(c1109.12,2904.65) 1103.56,2883.9 ; pad.1@1088.73,2897.88 ccw(c1109.12,2904.65) 1103.56,2883.9 ; 1101.21,2890 cw(c1101.21,2926.21) 1075.61,2900.61 ccw(c1101.21,2926.21) 1101.21,2890 ; 1101.21,2890 ccw(c1101.21,2853.79) 1075.61,2879.39 cw(c1101.21,2853.79) 1101.21,2890 ; 1104.93,2890 cw(c1104.93,2854.93) 1129.73,2879.73 ccw(c1104.93,2854.93) 1104.93,2890 ; 1104.93,2890 ccw(c1104.93,2925.07) 1129.73,2900.27 cw(c1104.93,2925.07) 1104.93,2890 ; P2.1@1125.36,2890 cw(c1125.36,2950.36) 1082.68,2907.68 ccw(c1125.36,2950.36) P2.1@1125.36,2890 ; P2.1@1125.36,2890 ccw(c1125.36,2829.64) 1082.68,2872.32 cw(c1125.36,2829.64) P2.1@1125.36,2890 ; P2.1@1164.8,2865.2 cw(c1189.6,2890) 1154.53,2890 ccw(c1189.6,2890) P2.1@1164.8,2865.2 ; P2.1@1164.8,2865.2 ccw(c1140,2840.4) 1140,2875.47 cw(c1140,2840.4) P2.1@1164.8,2865.2 ; 1181.87,2848.13 cw(c1223.74,2890) 1164.53,2890 ccw(c1223.74,2890) 1181.87,2848.13 ; 1181.87,2848.13 ccw(c1140,2806.26) 1140,2865.47 cw(c1140,2806.26) 1181.87,2848.13 ; 1413.8,2244 cw(c1413.8,2222.8) 1428.79,2237.79 ccw(c1413.8,2222.8) 1413.8,2244 ; 1413.8,2244 ccw(c1413.8,2265.2) 1428.79,2250.21 cw(c1413.8,2265.2) 1413.8,2244
PC1: P2.2 pad.1@1055,2790 U2.9 | length 2401.1
  Top Layer w10: v1(1429.78,2210) 1435.8,2203.98 1460,2203.98 ; U2.9@1507.68,2155.88 1507.68,2156.3 1460,2203.98 ; 1460,2203.98 cw(c1460,2233.45) 1436.72,2215.38 ccw(c1460,2233.45) 1460,2203.98
  Bottom Layer w10: pad.1@1055,2790 P2.2@1140,2790 1222.5,2707.5 1222.5,2275.13 1282.41,2215.22 1287.63,2210 v1(1429.78,2210) ; P2.2@1116.78,2782.1 ccw(c1095.78,2774.96) 1101.52,2796.39 ccw(c1105.72,2812.07) P2.2@1119.38,2803.28 ; P2.2@1116.78,2797.9 cw(c1095.78,2805.04) 1101.52,2783.61 cw(c1105.72,2767.93) P2.2@1119.38,2776.72 ; P2.2@1134.64,2788.9 ccw(c1172.3,2796.61) 1162.35,2759.48 ; P2.2@1141.1,2795.36 cw(c1133.39,2757.7) 1170.52,2767.65 ; pad.1@1080.79,2790 cw(c1080.79,2730.79) 1122.66,2772.66 ccw(c1080.79,2730.79) pad.1@1080.79,2790 ; pad.1@1080.79,2790 ccw(c1080.79,2849.21) 1122.66,2807.34 cw(c1080.79,2849.21) pad.1@1080.79,2790 ; pad.1@1086.36,2777.01 cw(c1099.56,2768.97) 1103.56,2783.9 ; pad.1@1086.36,2777.01 cw(c1099.56,2768.97) 1103.56,2783.9 ; pad.1@1086.36,2777.01 cw(c1099.56,2768.97) 1103.56,2783.9 ; pad.1@1086.36,2802.99 ccw(c1099.56,2811.03) 1103.56,2796.1 ; pad.1@1086.36,2802.99 ccw(c1099.56,2811.03) 1103.56,2796.1 ; pad.1@1086.36,2802.99 ccw(c1099.56,2811.03) 1103.56,2796.1 ; pad.1@1088.73,2782.12 cw(c1109.12,2775.35) 1103.56,2796.1 ; pad.1@1088.73,2782.12 cw(c1109.12,2775.35) 1103.56,2796.1 ; pad.1@1088.73,2782.12 cw(c1109.12,2775.35) 1103.56,2796.1 ; pad.1@1088.73,2797.88 ccw(c1109.12,2804.65) 1103.56,2783.9 ; pad.1@1088.73,2797.88 ccw(c1109.12,2804.65) 1103.56,2783.9 ; pad.1@1088.73,2797.88 ccw(c1109.12,2804.65) 1103.56,2783.9 ; 1101.21,2790 cw(c1101.21,2826.21) 1075.61,2800.61 ccw(c1101.21,2826.21) 1101.21,2790 ; 1101.21,2790 ccw(c1101.21,2753.79) 1075.61,2779.39 cw(c1101.21,2753.79) 1101.21,2790 ; 1104.93,2790 cw(c1104.93,2754.93) 1129.73,2779.73 ccw(c1104.93,2754.93) 1104.93,2790 ; 1104.93,2790 ccw(c1104.93,2825.07) 1129.73,2800.27 cw(c1104.93,2825.07) 1104.93,2790 ; P2.2@1125.36,2790 cw(c1125.36,2850.36) 1082.68,2807.68 ccw(c1125.36,2850.36) P2.2@1125.36,2790 ; P2.2@1125.36,2790 ccw(c1125.36,2729.64) 1082.68,2772.32 cw(c1125.36,2729.64) P2.2@1125.36,2790 ; 1164.8,2765.2 cw(c1189.6,2790) 1154.53,2790 ccw(c1189.6,2790) 1164.8,2765.2 ; 1164.8,2765.2 ccw(c1140,2740.4) 1140,2775.47 cw(c1140,2740.4) 1164.8,2765.2 ; 1181.87,2748.13 cw(c1223.74,2790) 1164.53,2790 ccw(c1223.74,2790) 1181.87,2748.13 ; 1181.87,2748.13 ccw(c1140,2706.26) 1140,2765.47 cw(c1140,2706.26) 1181.87,2748.13 ; 1408.58,2210 cw(c1408.58,2188.8) 1423.57,2203.79 ccw(c1408.58,2188.8) 1408.58,2210 ; 1408.58,2210 ccw(c1408.58,2231.2) 1423.57,2216.21 cw(c1408.58,2231.2) 1408.58,2210
PC2: P2.3 pad.1@1055,2690 U2.10 | length 2325.1
  Top Layer w10: v1@1456.79,2178.94 U2.10@1493.76,2141.96
  Bottom Layer w10: pad.1@1055,2690 P2.3@1140,2690 1205,2625 1205,2270 1275.78,2199.22 1293.06,2181.94 1433.06,2181.94 ; P2.3@1116.78,2682.1 ccw(c1095.78,2674.96) 1101.52,2696.39 ccw(c1105.72,2712.07) P2.3@1119.38,2703.28 ; P2.3@1116.78,2697.9 cw(c1095.78,2705.04) 1101.52,2683.61 cw(c1105.72,2667.93) P2.3@1119.38,2676.72 ; P2.3@1134.64,2688.9 ccw(c1172.3,2696.61) 1162.35,2659.48 ; P2.3@1141.1,2695.36 cw(c1133.39,2657.7) 1170.52,2667.65 ; v1(1450,2178.94) 1447,2181.94 1433.06,2181.94 ; pad.1@1080.79,2690 cw(c1080.79,2630.79) 1122.66,2672.66 ccw(c1080.79,2630.79) pad.1@1080.79,2690 ; pad.1@1080.79,2690 ccw(c1080.79,2749.21) 1122.66,2707.34 cw(c1080.79,2749.21) pad.1@1080.79,2690 ; pad.1@1086.36,2677.01 cw(c1099.56,2668.97) 1103.56,2683.9 ; pad.1@1086.36,2677.01 cw(c1099.56,2668.97) 1103.56,2683.9 ; pad.1@1086.36,2677.01 cw(c1099.56,2668.97) 1103.56,2683.9 ; pad.1@1086.36,2702.99 ccw(c1099.56,2711.03) 1103.56,2696.1 ; pad.1@1086.36,2702.99 ccw(c1099.56,2711.03) 1103.56,2696.1 ; pad.1@1086.36,2702.99 ccw(c1099.56,2711.03) 1103.56,2696.1 ; pad.1@1088.73,2682.12 cw(c1109.12,2675.35) 1103.56,2696.1 ; pad.1@1088.73,2682.12 cw(c1109.12,2675.35) 1103.56,2696.1 ; pad.1@1088.73,2682.12 cw(c1109.12,2675.35) 1103.56,2696.1 ; pad.1@1088.73,2697.88 ccw(c1109.12,2704.65) 1103.56,2683.9 ; pad.1@1088.73,2697.88 ccw(c1109.12,2704.65) 1103.56,2683.9 ; pad.1@1088.73,2697.88 ccw(c1109.12,2704.65) 1103.56,2683.9 ; 1101.21,2690 cw(c1101.21,2726.21) 1075.61,2700.61 ccw(c1101.21,2726.21) 1101.21,2690 ; 1101.21,2690 ccw(c1101.21,2653.79) 1075.61,2679.39 cw(c1101.21,2653.79) 1101.21,2690 ; 1104.93,2690 cw(c1104.93,2654.93) 1129.73,2679.73 ccw(c1104.93,2654.93) 1104.93,2690 ; 1104.93,2690 ccw(c1104.93,2725.07) 1129.73,2700.27 cw(c1104.93,2725.07) 1104.93,2690 ; P2.3@1125.36,2690 cw(c1125.36,2750.36) 1082.68,2707.68 ccw(c1125.36,2750.36) P2.3@1125.36,2690 ; P2.3@1125.36,2690 ccw(c1125.36,2629.64) 1082.68,2672.32 cw(c1125.36,2629.64) P2.3@1125.36,2690 ; 1164.8,2665.2 cw(c1189.6,2690) 1154.53,2690 ccw(c1189.6,2690) 1164.8,2665.2 ; 1164.8,2665.2 ccw(c1140,2640.4) 1140,2675.47 cw(c1140,2640.4) 1164.8,2665.2 ; 1181.87,2648.13 cw(c1223.74,2690) 1164.53,2690 ccw(c1223.74,2690) 1181.87,2648.13 ; 1181.87,2648.13 ccw(c1140,2606.26) 1140,2665.47 cw(c1140,2606.26) 1181.87,2648.13 ; 1433.06,2181.94 cw(c1433.06,2172.65) v1@1441.77,2175.88 ; 1433.06,2181.94 cw(c1433.06,2172.65) v1@1441.77,2175.88 ; 1433.06,2181.94 cw(c1433.06,2172.65) v1@1441.77,2175.88 ; 1433.06,2181.94 cw(c1433.06,2172.65) v1@1441.77,2175.88 ; 1436.06,2181.94 ccw(c1436.06,2192.88) v1@1443.79,2185.15 ; 1436.06,2181.94 ccw(c1436.06,2192.88) v1@1443.79,2185.15 ; 1436.06,2181.94 ccw(c1436.06,2192.88) v1@1443.79,2185.15 ; 1436.06,2181.94 ccw(c1436.06,2192.88) v1@1443.79,2185.15 ; 1436.06,2181.94 ccw(c1436.06,2192.88) v1@1443.79,2185.15 ; 1436.06,2181.94 ccw(c1436.06,2192.88) v1@1443.79,2185.15 ; 1421.55,2181.94 cw(c1421.55,2150.49) 1443.79,2172.73 ccw(c1421.55,2150.49) 1421.55,2181.94